# EAGLE board 4draft_onBoard_condensed (EAGLE 8.1.0)
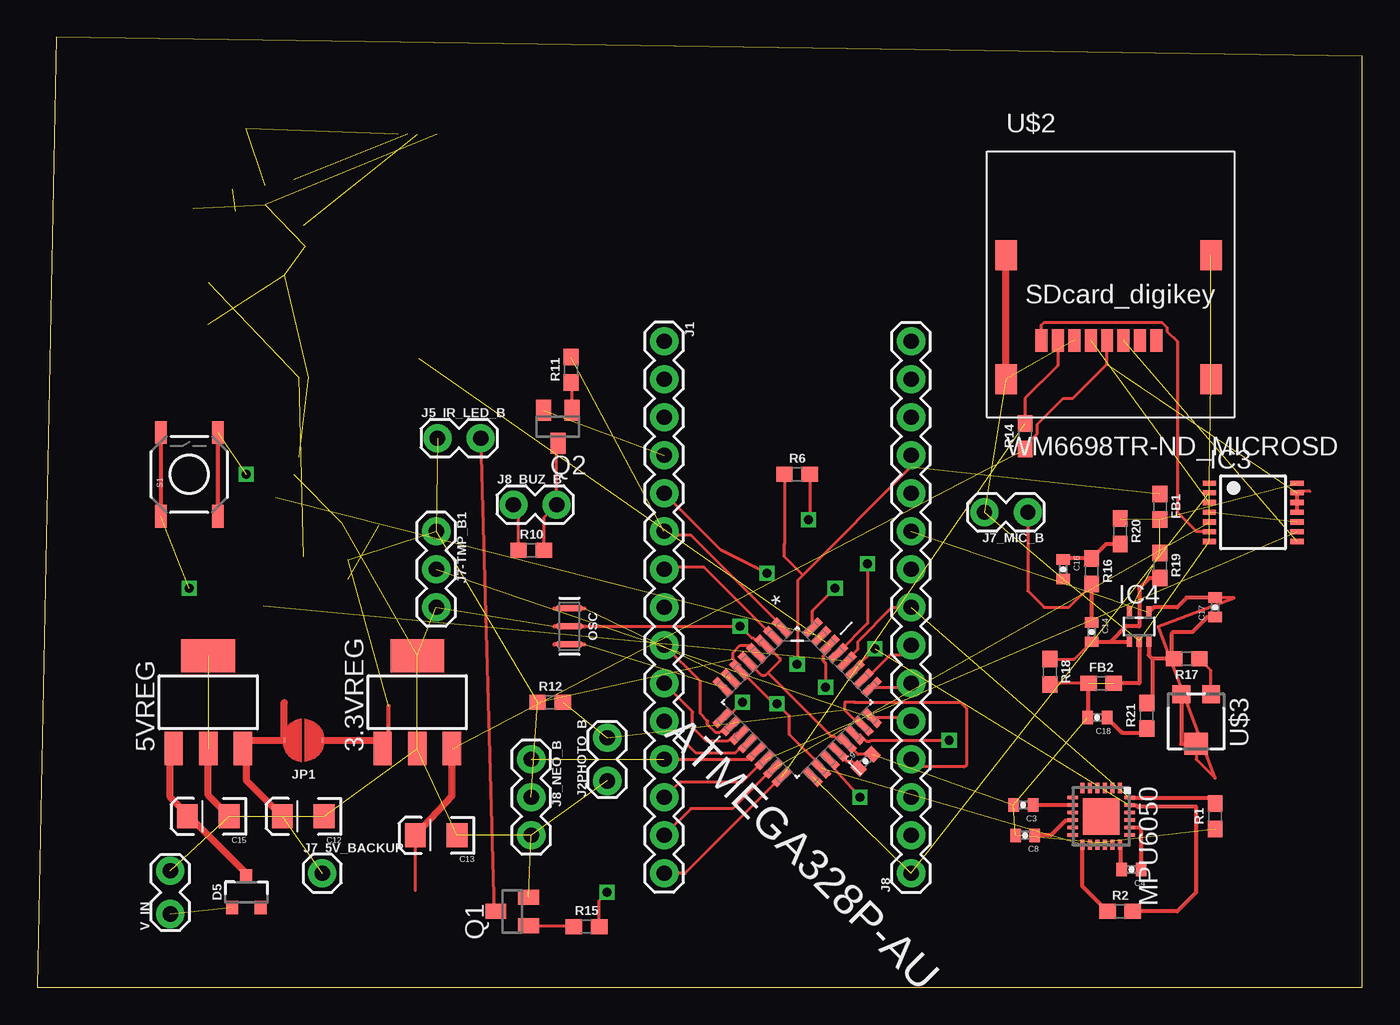
[diagram p0: board, top side]
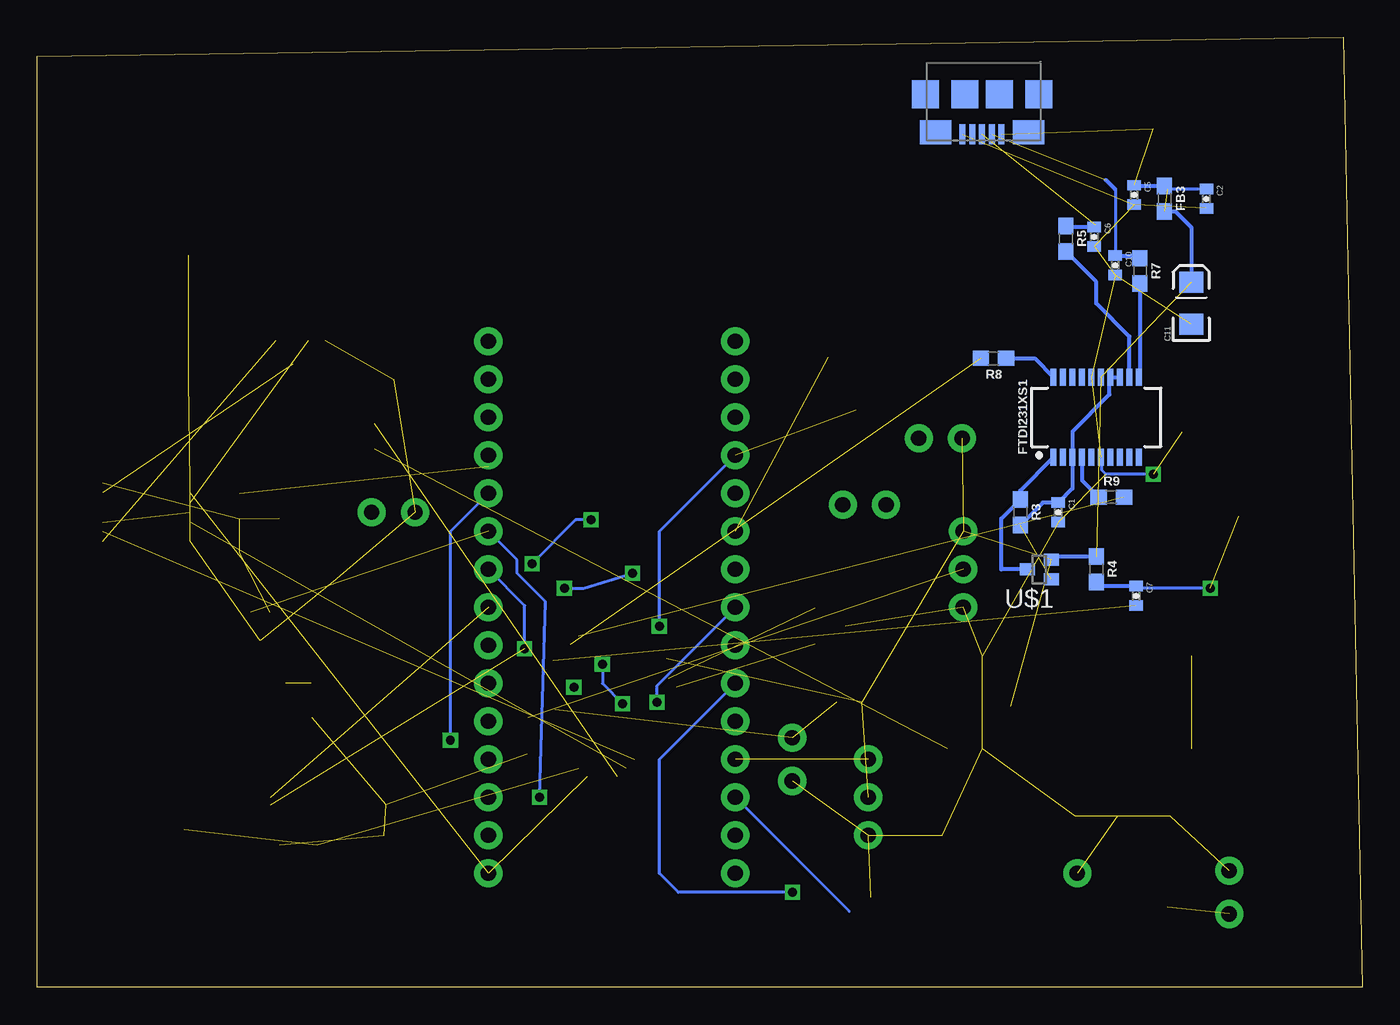
[diagram p1: board, bottom side, seen from below]

Size 88.57 x 63.49 mm. Coordinates in mm from the lower left corner, seen from the top.
Outline: 0,0 88.57,0 88.57,62.22 1.27,63.49 0,0
Copper layers (1*16): Top 0.035mm / dielectric 1.5mm / Bottom 0.035mm
Design rules "default *": minimum track width 8mil, minimum drill 14mil, track to track 8mil, track to pad 8mil, pad to pad 8mil, via to via 8mil, smd to smd 8mil, copper to edge 40mil, drill to drill 8mil, minimum pad ring 10mil, minimum via ring 8mil, stop-mask expansion 4mil, vias tented up to drill 0mil, thermal gap 10mil

## Footprints (pad centres in the part's own frame; a part is rotated, then mirrored left to right if it is on the bottom)
SOT223 = smd 1.219 x 2.235: 1 -2.311,-3.099; 2 0,-3.099; 3 2.311,-3.099 | smd 3.6 x 2.2: 4 0,3.099
QFP80P900X900X120-32N = smd 1.473 x 0.508: 1 -4.242,2.794; 2 -4.242,2.007; 3 -4.242,1.194; 4 -4.242,0.406; 5 -4.242,-0.406; 6 -4.242,-1.194; 7 -4.242,-2.007; 8 -4.242,-2.794; 17 4.242,-2.794; 18 4.242,-2.007; 19 4.242,-1.194; 20 4.242,-0.406; 21 4.242,0.406; 22 4.242,1.194; 23 4.242,2.007; 24 4.242,2.794 | smd 0.508 x 1.473: 9 -2.794,-4.242; 10 -2.007,-4.242; 11 -1.194,-4.242; 12 -0.406,-4.242; 13 0.406,-4.242; 14 1.194,-4.242; 15 2.007,-4.242; 16 2.794,-4.242; 25 2.794,4.242; 26 2.007,4.242; 27 1.194,4.242; 28 0.406,4.242; 29 -0.406,4.242; 30 -1.194,4.242; 31 -2.007,4.242; 32 -2.794,4.242
0402-CAP = smd 0.7 x 0.9: 1 -0.65,0; 2 0.65,0
EIA3216 = smd 1.4 x 1.6: A 1.4,0; C -1.4,0
SOT23-3 = smd 0.8 x 0.9: 1 -0.95,-1; 2 0.95,-1; 3 0,1.1
0603 = smd 1.1 x 1: 1 -0.85,0; 2 0.85,0
SSOP20_L = smd 0.381 x 1.143: 1 -2.857,-2.68; 2 -2.223,-2.68; 3 -1.587,-2.68; 4 -0.953,-2.68; 5 -0.318,-2.68; 6 0.318,-2.68; 7 0.953,-2.68; 8 1.587,-2.68; 9 2.223,-2.68; 10 2.857,-2.68; 11 2.857,2.68; 12 2.223,2.68; 13 1.587,2.68; 14 0.953,2.68; 15 0.318,2.68; 16 -0.318,2.68; 17 -0.953,2.68; 18 -1.587,2.68; 19 -2.223,2.68; 20 -2.857,2.68
TSSOP14 = smd 0.35 x 0.9: 1 -1.95,-2.925; 2 -1.3,-2.925; 3 -0.65,-2.925; 4 0,-2.925; 5 0.65,-2.925; 6 1.3,-2.925; 7 1.95,-2.925; 8 1.95,2.925; 9 1.3,2.925; 10 0.65,2.925; 11 0,2.925; 12 -0.65,2.925; 13 -1.3,2.925; 14 -1.95,2.925
SC70-5 = smd 0.35 x 0.8: 1 -0.65,-0.95; 2 0,-0.95; 3 0.65,-0.95; 4 0.65,0.95; 5 -0.65,0.95
1X15 = drill 1.016 pad 1.88: 1 0,0; 2 2.54,0; 3 5.08,0; 4 7.62,0; 5 10.16,0; 6 12.7,0; 7 15.24,0; 8 17.78,0; 9 20.32,0; 10 22.86,0; 11 25.4,0; 12 27.94,0; 13 30.48,0; 14 33.02,0; 15 35.56,0
MICRO-USB-DIGIKEY-FCI2 = smd 0.4 x 1.35: D+ 0,2.67; D- -0.65,2.67; GND 1.3,2.67; ID 0.65,2.67; VCC -1.3,2.67 | smd 2.1 x 1.6: SHIELD -3.1,2.55; SHIELD1 3.1,2.55 | smd 1.8 x 1.9: SHIELD2 -3.8,0; SHIELD3 -1.15,0; SHIELD4 1.15,0; SHIELD5 3.8,0
1X02_LOCK = drill 1.016 pad 1.88: 1 -0.178,0; 2 2.718,0
1X03 = drill 1.016 pad 1.88: 1 0,0; 2 2.54,0; 3 5.08,0
1X01 = drill 1.016 pad 1.88: 1 0,0
SMT-JUMPER_2_NO_NO-SILK_ROUND = smd 0.152 x 0.305: 1 -1.27,0; 2 1.27,0
QFN24-4X4 = smd 0.7 x 0.25: 1 -1.9,1.25; 2 -1.9,0.75; 3 -1.9,0.25; 4 -1.9,-0.25; 5 -1.9,-0.75; 6 -1.9,-1.25; 13 1.9,-1.25; 14 1.9,-0.75; 15 1.9,-0.25; 16 1.9,0.25; 17 1.9,0.75; 18 1.9,1.25 | smd 0.25 x 0.7: 7 -1.25,-1.9; 8 -0.75,-1.9; 9 -0.25,-1.9; 10 0.25,-1.9; 11 0.75,-1.9; 12 1.25,-1.9; 19 1.25,1.9; 20 0.75,1.9; 21 0.25,1.9; 22 -0.25,1.9; 23 -0.75,1.9; 24 -1.25,1.9 | smd 2.45 x 2.45: EXP 0,0
RESONATOR-SMD-3.2X1.3 = smd 0.45 x 1.905: 1 -1.2,0; 2 0,0; 3 1.2,0
SOT23 = smd 1 x 1.4: 1 -0.95,-1.1; 2 0.95,-1.1; 3 0,1.1
TACTILE-SWITCH-SMD = smd 1.524 x 0.762: 1 -2.794,1.905; 2 2.794,1.905; 3 -2.794,-1.905; 4 2.794,-1.905
SOT323W_INFINEON = smd 1 x 0.8: 1 -0.8,0.65; 2 0.8,0; 3 -0.8,-0.65
MICROSD2 = smd 0.8 x 1.5: CD/DAT3/SS/CS 8.95,2.6; CLK 5.65,2.6; CMD 7.85,2.6; DAT0 3.45,2.6; DAT1 2.35,2.6; DAT2 10.05,2.6; VDD 6.75,2.6; VSS 4.55,2.6 | smd 1.45 x 2: GND 0,8.3; GND2 13.7,8.3; GND3 13.7,0; GND4 0,0
TC33X-2 = smd 1.2 x 1.2: 1 -1.8,1; 3 -1.8,-1 | smd 1.5 x 1.6: 2 1.5,0

## Placement (x,y rotation side)
3.3VREG  [SOT223]  25.4,19.05 0 top
5VREG  [SOT223]  11.43,19.05 0 top
ATMEGA328P-AU  ATMEGA328P-AU  [QFP80P900X900X120-32N]  50.8,19.05 315 top
C1  .1uF  [0402-CAP]  20.32,31.75 270 bottom
C2  .1uF  [0402-CAP]  10.41,52.71 270 bottom
C3  10nF  [0402-CAP]  65.91,12.19 180 top
C4  2.2nF  [0402-CAP]  73.15,7.87 180 top
C5  .1uF  [0402-CAP]  15.24,52.96 270 bottom
C6  47pF  [0402-CAP]  17.91,50.16 270 bottom
C7  .1uF  [0402-CAP]  15.11,26.16 270 bottom
C8  .1uF  [0402-CAP]  66.04,10.16 180 top
C9  .01 uF  [0402-CAP]  55.37,15.11 45 top
C10  47pF  [0402-CAP]  16.51,48.26 270 bottom
C11  10uF  [EIA3216]  11.43,45.72 90 bottom
C12  10uF  [EIA3216]  17.78,11.43 180 top
C13  10uF  [EIA3216]  26.67,10.16 180 top
C14  .01uF  [0402-CAP]  70.48,23.75 270 top
C15  47uF  [EIA3216]  11.43,11.43 180 top
C16  .1uF  [0402-CAP]  68.58,27.94 270 top
C17  100pF  [0402-CAP]  78.74,25.4 90 top
C18  10uF  [0402-CAP]  70.87,18.03 180 top
D5  700mA/40V/533mV  [SOT23-3]  13.97,6.35 0 top
FB1  30Ω/1.8A  [0603]  75.06,32.13 270 top
FB2  30Ω/1.8A  [0603]  71.12,20.32 0 top
FB3  30Ω/1.8A  [0603]  13.21,52.71 270 bottom
FTDI231XS1  FT231XS  [SSOP20_L]  17.78,38.1 0 bottom
IC3  74ABT125PW  [TSSOP14]  81.28,31.75 270 top
IC4  MAX4466KS  [SC70-5]  73.66,24.13 0 top
J1  [1X15]  41.91,43.18 270 top
J2  USB_MINI-B_DIGIKEY  [MICRO-USB-DIGIKEY-FCI2]  25.41,59.69 180 bottom
J2PHOTO_B  [1X02_LOCK]  38.1,13.97 90 top
J5_IR_LED_B  [1X02_LOCK]  26.92,36.7 0 top
J7-TMP_B1  [1X03]  26.67,30.48 270 top
J7_5V_BACKUP  [1X01]  19.05,7.62 0 top
J7_MIC_B  [1X02_LOCK]  66.04,31.75 180 top
J8  [1X15]  58.42,7.62 90 top
J8_BUZ_B  [1X02_LOCK]  32,32.26 0 top
J8_NEO_B  [1X03]  33.02,15.24 270 top
JP1  JUMPER-SMT_2_NO_NO-SILK_ROUND  [SMT-JUMPER_2_NO_NO-SILK_ROUND]  17.78,16.51 180 top
MPU6050  MPU-6050  [QFN24-4X4]  71.12,11.43 270 top
OSC  [RESONATOR-SMD-3.2X1.3]  35.56,24.13 270 top
Q1  NPN 40V 1A SOT-23  [SOT23]  31.75,5.08 90 top
Q2  [SOT23]  34.8,37.47 180 top
R1  10k  [0603]  78.74,11.43 90 top
R2  10k  [0603]  72.39,5.08 0 top
R3  10k  [0603]  22.86,31.75 270 bottom
R4  10k  [0603]  17.78,27.94 270 bottom
R5  27  [0603]  19.81,50.04 270 bottom
R6  10k  [0603]  50.8,34.29 0 top
R7  27  [0603]  14.86,47.88 270 bottom
R8  1k  [0603]  24.64,42.04 180 bottom
R9  1k  [0603]  16.76,32.77 0 bottom
R10  1k  [0603]  33.02,29.21 0 top
R11  1k  [0603]  35.69,41.28 90 top
R12  2.2K  [0603]  34.29,19.05 0 top
R14  10k  [0603]  66.04,36.83 90 top
R15  1k  [0603]  36.7,4.06 0 top
R16  1k  [0603]  70.48,27.81 270 top
R17  22k  [0603]  76.83,21.97 180 top
R18  1M  [0603]  67.69,21.08 270 top
R19  1M  [0603]  75.06,28.19 270 top
R20  1k  [0603]  72.39,30.48 270 top
R21  1k  [0603]  74.17,18.16 90 top
S1  TAC_SWITCHSMD  [TACTILE-SWITCH-SMD]  10.16,34.29 90 top
U$1  1N7002PW  [SOT323W_INFINEON]  21.59,27.94 180 bottom
U$2  WM6698TR-ND_MICROSD  [MICROSD2]  64.77,40.64 0 top
U$3  TC33X-2POT  [TC33X-2]  77.47,17.78 270 top
V_IN  [1X02_LOCK]  8.89,5.08 90 top

## Library data of the parts
3.3VREG 5VREG = linear-technology; MPN: LT1129CST-5#PBF; OC_FARNELL: 1663375; OC_NEWARK: 57M2069
ATMEGA328P-AU = Atmega-328pu; DESCRIPTION: 8-bit Microcontroller with In-System Programmable Flash; MPN: ATMEGA328P-AU; OC_FARNELL: 1715486; OC_NEWARK: 14R4631; PACKAGE: TQFP-32; SUPPLIER: Atmel
C1-C10 C14 C16-C18 = SparkFun-Retired; PROD_ID: CAP-09885
C11-C13 C15 = SparkFun-Retired; PROD_ID: CAP-00811
D5 = SparkFun-DiscreteSemi; PROD_ID: DIO-08411
FB1-FB3 = SparkFun-Coils; PROD_ID: NDUC-07859
FTDI231XS1 = SparkFun-IC-Comms; PROD_ID: IC-11524
IC3 = 74xx-us
IC4 J2 MPU6050 U$1-U$3 = KevinKuwata1
J1 J2PHOTO_B J5_IR_LED_B J7-TMP_B1 J7_5V_BACKUP J7_MIC_B J8 J8_BUZ_B J8_NEO_B V_IN = SparkFun-Connectors
JP1 = SparkFun-Jumpers
OSC = SparkFun-Clocks
Q1 Q2 = semicon-smd-ipc
R1-R12 R14-R21 = SparkFun-Resistors; PROD_ID: RES-12535
S1 = SparkFun-Retired; PROD_ID: SWCH-08247

## Nets
2.2NF: C4.1 MPU6050.20
3.3V: 3.3VREG.3 C13.A IC3.11 IC3.12 IC3.13 R14.1 U$2.VDD
3.3VFTDI: C1.1 FTDI231XS1.3 FTDI231XS1.13 FTDI231XS1.14 R3.2 U$1.1
5REGOUT: 5VREG.3 C12.A J7_5V_BACKUP.1 JP1.2
5V: 3.3VREG.1 ATMEGA328P-AU.4 ATMEGA328P-AU.6 ATMEGA328P-AU.18 C2.1 C5.1 C11.A FB1.1 FB3.1 FB3.2 FTDI231XS1.15 J2.VCC J5_IR_LED_B.1 J7-TMP_B1.1 J8.12 J8_NEO_B.2 JP1.1 MPU6050.13 R1.1 R2.1 R4.1 R6.1 R12.1 U$1.3
10NF: C3.1 MPU6050.8
.UF: C8.1 MPU6050.10
A0: ATMEGA328P-AU.23 J2PHOTO_B.2 J8.4 R12.2
A1: ATMEGA328P-AU.24 J7-TMP_B1.2 J8.5
A2: ATMEGA328P-AU.25 J8.6
A3: ATMEGA328P-AU.26 J8.7
A6: ATMEGA328P-AU.19 C17.2 IC4.4 J8.10 U$3.2 U$3.3
A7: ATMEGA328P-AU.22 J8.11
ADO: MPU6050.9
AVCC: FB1.2 IC3.14 IC4.5 R19.1 R20.1
BUZ+: J8_BUZ_B.1 R10.1
BUZ-: J8_BUZ_B.2 Q2.3 R10.2
D2: ATMEGA328P-AU.32 J1.5
D3: ATMEGA328P-AU.1 J1.6 R11.2
D4: ATMEGA328P-AU.2 J1.7
D5: ATMEGA328P-AU.9 J1.8
D6: ATMEGA328P-AU.10 J1.9
D7: ATMEGA328P-AU.11 J1.10 R15.2
D8: ATMEGA328P-AU.12 J1.11
D9: ATMEGA328P-AU.13 J1.12 J8_NEO_B.1
D+: C6.1 J2.D+ R5.1
D-: C10.1 J2.D- R7.1
DTR: C7.1 R4.2 S1.1 S1.2
DTR_FTDI: FTDI231XS1.1 R3.1 U$1.2
GND: 3.3VREG.2 3.3VREG.4 5VREG.2 5VREG.4 ATMEGA328P-AU.3 ATMEGA328P-AU.5 ATMEGA328P-AU.21 C1.2 C2.2 C3.2 C4.2 C5.2 C6.2 C8.2 C9.2 C10.2 C11.C C12.C C13.C C15.C C16.2 C18.2 FB2.1 FB2.2 FTDI231XS1.6 FTDI231XS1.16 IC3.1 IC3.4 IC3.7 IC3.10 IC4.2 J1.4 J2.GND J2PHOTO_B.1 J7-TMP_B1.3 J7_MIC_B.2 J8_NEO_B.3 MPU6050.18 OSC.2 Q1.2 Q2.2 R18.2 S1.3 S1.4 U$2.GND U$2.GND2 U$2.GND3 U$2.GND4 U$2.VSS V_IN.2
INT: MPU6050.12
IR_-: J5_IR_LED_B.2 Q1.3
IR_LED: Q1.1 R15.1
MISO: ATMEGA328P-AU.16 J1.15 R14.2 U$2.DAT0
MOSI: ATMEGA328P-AU.15 IC3.5 J1.14
N$1: ATMEGA328P-AU.7 OSC.1
N$2: ATMEGA328P-AU.8 OSC.3
N$6: ATMEGA328P-AU.20 C9.1
N$10: IC3.6 U$2.DAT1
N$12: R17.1 U$3.1
N$14: FTDI231XS1.11 R7.2
N$15: FTDI231XS1.12 R5.2
N$17: C16.1 R16.1 R20.2
N$20: Q2.1 R11.1
N$22: D5.1 V_IN.1
N$24: C14.1 J7_MIC_B.1 R16.2
N$25: C14.2 IC4.1 R18.1 R19.2
N$29: C18.1 R21.1
N$30: C17.1 IC4.3 R17.2 R21.2
RESET: ATMEGA328P-AU.29 R6.2
RX: FTDI231XS1.4 R9.1
RX-I: ATMEGA328P-AU.30 R8.2
RXLED: FTDI231XS1.17
SCK: ATMEGA328P-AU.17 IC3.2 J8.1
SCK_BUFF: IC3.3 U$2.CLK
SCL: ATMEGA328P-AU.27 J8.9 MPU6050.23 R2.2
SDA: ATMEGA328P-AU.28 C7.2 J8.8 MPU6050.24 R1.2
SS: ATMEGA328P-AU.14 IC3.9 J1.13
SS_BUFF: IC3.8 U$2.CMD
TX: FTDI231XS1.20 R8.1
TX-O: ATMEGA328P-AU.31 R9.2
TXLED: FTDI231XS1.10
VIN: 5VREG.1 C15.A D5.3

## Tracks (layer width: path | path; a pad name or v marks a point on that pad's centre or on a via)
2.2NF
  Top 0.254: MPU6050.20 73.03,10.67 73.66,10.67 73.8,10.53 C4.1
3.3V  (2 unrouted)
  Top 0.203: C13.A 25.27,6.48 | 85.09,33.15 84.3,33.15 IC3.13 | R14.1 66.04,36.2 66.84,37 66.84,37.64 68.58,39.37 69.22,39.37 71.5,41.66 71.5,43.22 U$2.VDD
  Top 0.254: IC3.11 IC3.12 IC3.13
  Top 0.457: C13.A 27.71,12.8 3.3VREG.3
3.3VFTDI  (1 unrouted)
  Bottom 0.254: FTDI231XS1.13 FTDI231XS1.14 16.89,40.72 16.89,39.62 19.37,37.15 FTDI231XS1.3 19.37,33.35 C1.1 21.36,32.4 R3.2
5REGOUT  (1 unrouted)
  Top 0.457: 16.51,19.05 JP1.2 14.3,16.51 5VREG.3 13.97,15.72 13.97,13.84 C12.A
5V  (via drill 0.6)  (14 unrouted)
  Top 0.203: ATMEGA328P-AU.4 47.56,22.86 46.99,22.86 46.51,22.38 46.51,21.98 46.96,21.53 ATMEGA328P-AU.6 47.33,20.83 47.37,20.83 49.23,18.97 v49.45,18.97 50.29,18.12 50.29,16.89 52.38,14.8 ATMEGA328P-AU.18 | J8.12 58.42,34.78 51.19,27.55 | v50.8,21.59 50.82,21.61 50.82,27.18 51.19,27.55 | R6.1 49.95,29.63 49.91,29.59 49.91,28.83 51.19,27.55
  Top 0.254: MPU6050.13 69.87,6.75 R2.1 | 3.3VREG.1 23.5,16.36 23.5,18.8
  Top 0.457: JP1.1 22.53,16.51 3.3VREG.1
  Bottom 0.203: v50.8,21.59 50.8,20.32 v49.45,18.97 | C2.1 13.01,53.36 FB3.1
  Bottom 0.254: FB3.1 15.19,53.55 C5.1 | R4.1 20.59,28.79 U$1.3 | FB3.2 12.48,51.86 11.43,50.8 C11.A
10NF
  Top 0.254: MPU6050.8 66.58,12.18 C3.1
.UF
  Top 0.254: MPU6050.10 69.17,11.13 68.73,11.13 67.76,10.16 C8.1
A0  (2 unrouted)
  Top 0.203: 55.17,17.47 ATMEGA328P-AU.23 54.91,17.78 54.74,17.78 53.98,18.54 53.98,19.05 54.61,19.05 54.63,19.07 61.7,19.07 62.1,18.67 62.1,14.86 61.98,14.73 58.93,14.73 J8.4
A1  (1 unrouted)
  Top 0.203: ATMEGA328P-AU.24 58.17,18.03 J8.5
A2
  Top 0.203: ATMEGA328P-AU.25 58.17,20.07 J8.6
A3
  Top 0.203: ATMEGA328P-AU.26 55.43,20.63 57.02,22.22 57.78,22.22 J8.7
A6  (via drill 0.6)  (1 unrouted)
  Top 0.203: ATMEGA328P-AU.19 52.95,14.99 v54.99,12.7 | U$3.2 77.47,15.24 78.74,13.97 74.93,24.13 80.01,26.04 78.75,26.04 C17.2
  Top 0.254: U$3.3 76.47,16.28 U$3.2 | IC4.4 74.63,25.4 76.2,25.4 76.85,26.05 C17.2
  Bottom 0.203: v54.99,12.7 54.61,25.78 56.52,27.69 56.52,28.57 J8.10
A7  (via drill 0.6)
  Top 0.203: ATMEGA328P-AU.22 55,16.89 55.43,16.46 55.69,16.46 55.73,16.51 v60.96,16.51
  Bottom 0.203: v60.96,16.51 60.96,30.48 J8.11
AVCC  (4 unrouted)
BUZ+
  Top 0.203: R10.1 32.17,31.91 J8_BUZ_B.1
BUZ-
  Top 0.203: Q2.3 34.72,36.29 J8_BUZ_B.2 33.87,31.41 R10.2
D2  (via drill 0.6)
  Top 0.203: ATMEGA328P-AU.32 51.82,25.15 v53.34,26.67 | v48.77,27.69 45.72,29.21 J1.5
  Bottom 0.203: v53.34,26.67 52.07,26.67 v48.77,27.69
D3  (1 unrouted)
  Top 0.203: ATMEGA328P-AU.1 49.78,24.14 43.69,30.23 42.16,30.23 J1.6 41.78,30.35
D4
  Top 0.203: ATMEGA328P-AU.2 49.18,23.47 44.58,28.07 42.04,28.07 J1.7
D5  (via drill 0.6)
  Top 0.203: ATMEGA328P-AU.9 46.11,18.03 v47.14,19.05
  Bottom 0.203: v47.14,19.05 47.14,20.17 J1.8
D6
  Top 0.203: ATMEGA328P-AU.10 46.06,17.47 45.61,17.02 45.36,17.02 44.82,17.56 44.82,17.79 44.32,18.29 44.32,20.45 J1.9
D7  (via drill 0.6)
  Top 0.203: ATMEGA328P-AU.11 46.6,16.89 46.17,16.46 44.75,16.46 43.81,17.4 43.81,18.41 J1.10 | R15.2 37.55,5.8 v38.1,6.35
  Bottom 0.203: v38.1,6.35 45.72,6.35 46.99,7.62 46.99,15.24 J1.10
D8
  Top 0.203: ATMEGA328P-AU.12 47.33,16.34 46.63,15.65 44.04,15.65 J1.11
D9  (1 unrouted)
  Top 0.203: J1.12 47.56,15.24 ATMEGA328P-AU.13
D+  (1 unrouted)
  Bottom 0.254: 17.79,50.93 C6.1 19.74,50.82 R5.1
D-  (1 unrouted)
  Bottom 0.203: 16.51,53.34 C10.1
  Bottom 0.254: 17.14,53.97 16.51,53.34 | R7.1 14.86,48.91 C10.1
DTR  (via drill 0.6)  (1 unrouted)
  Top 0.254: S1.2 S1.1
  Bottom 0.203: v10.16,26.67 14.97,26.67 C7.1
  Bottom 0.254: C7.1 17.5,26.81 R4.2
DTR_FTDI
  Bottom 0.254: FTDI231XS1.1 22.86,33.2 R3.1 24.13,31.33 24.13,27.94 U$1.2
GND  (via drill 0.6)  (37 unrouted)
  Top 0.203: 48.83,21.02 49.66,21.84 49.66,21.97 48.73,22.89 ATMEGA328P-AU.3 48.32,22.89 47.87,23.34 47.78,23.34 v46.99,24.13 OSC.2 | 48.83,21.02 48.64,20.83 48.45,20.83 ATMEGA328P-AU.5 | 48.83,21.02 53.08,16.77 53.3,16.77 53.73,16.34 ATMEGA328P-AU.21 54.85,15.57 C9.2 | FB2.1 67.78,20.32 R18.2 | 68.56,27.3 C16.2
  Top 0.254: S1.4 S1.3 | MPU6050.18 72.39,9.51 72.39,7.99 C4.2 | IC4.2 73.66,20.32 FB2.2 | FB2.1 70.27,18.09 C18.2
  Top 0.457: C15.C 11.43,12.83 5VREG.2 | U$2.GND4 U$2.GND
  Bottom 0.203: v46.99,24.13 46.99,30.48 J1.4 | v13.97,34.29 17.14,34.29 17.4,34.54 17.4,35.36 FTDI231XS1.6
  Bottom 0.254: 17.92,49.53 C6.2 17.89,49.53
IR_-
  Top 0.203: J5_IR_LED_B.2 30.52,4.95 Q1.3
IR_LED
  Top 0.203: Q1.1 35.79,4.13 R15.1
MISO  (1 unrouted)
  Top 0.203: ATMEGA328P-AU.16 49.76,14.08 43.31,7.62 J1.15 | U$2.DAT0 68.22,41.55 66.04,39.37 R14.2
MOSI  (1 unrouted)
  Top 0.203: ATMEGA328P-AU.15 49.18,14.63 46.48,11.94 43.69,11.94 J1.14
N$1  (1 unrouted)
N$2  (1 unrouted)
N$6
  Top 0.203: ATMEGA328P-AU.20 53.51,15.7 54.1,15.11 54.45,15.11 C9.1
N$10
  Top 0.203: U$2.DAT1 67.12,44.26 67.31,44.45 75.19,44.45 75.53,44.12 75.53,43.86 76.2,43.18 76.2,31.75 77.47,30.48 78.33,30.48 IC3.6
N$12
  Top 0.203: U$3.1 78.47,21.19 R17.1
N$14
  Bottom 0.254: R7.2 14.86,40.84 FTDI231XS1.11
N$15
  Bottom 0.254: FTDI231XS1.12 15.56,43.5 17.78,45.72 17.78,47.16 R5.2
N$17
  Top 0.254: C16.1 68.65,28.66 R16.1 71.45,29.63 R20.2
N$20
  Top 0.203: Q2.1 35.75,40.36 R11.1
N$22  (1 unrouted)
N$24
  Top 0.203: R16.2 70.48,26.92 68.96,25.4 67.31,25.4 66.22,26.49 J7_MIC_B.1
  Top 0.254: C14.1 R16.2
N$25
  Top 0.203: R18.1 69.32,21.93 C14.2
  Top 0.254: 71.75,23.1 C14.2 70.3,23.28 | 71.75,23.1 72.93,23.1 IC4.1 | R19.2 74.33,27.34 73.66,26.67 73.66,24.13 72.79,24.13 71.75,23.1
N$29
  Top 0.254: C18.1 71.52,18.02 72.52,17.02 73.88,17.02 R21.1
N$30
  Top 0.254: IC4.3 74.31,22.21 74.55,21.97 | 74.55,21.97 R17.2 75.82,22.14 75.82,23.62 75.95,23.75 77.22,23.75 78.22,24.75 C17.1 | 74.55,21.97 74.55,19.39 R21.2
RESET  (via drill 0.6)
  Top 0.203: R6.2 51.65,31.33 v51.56,31.24 | v55.5,28.32 55.5,24.32 ATMEGA328P-AU.29
  Bottom 0.203: v51.56,31.24 52.58,31.24 v55.5,28.32
RX
  Bottom 0.254: FTDI231XS1.4 18.73,33.88 R9.1
RX-I  (via drill 0.6)  (1 unrouted)
  Top 0.203: ATMEGA328P-AU.30 52.95,22.57 52.51,22.12 52.51,21.87 52.7,21.67 v52.7,20.07
SCK  (2 unrouted)
SCK_BUFF  (1 unrouted)
SCL  (via drill 0.6)  (1 unrouted)
  Top 0.203: ATMEGA328P-AU.27 54.64,21.28 v55.99,22.63
  Top 0.254: R2.2 76.2,5.08 77.47,6.35 77.47,12.07 73.58,12.07 73.51,12.13 73.06,12.13 MPU6050.23
  Bottom 0.203: v55.99,22.63 55.99,25.51 J8.9
SDA  (2 unrouted)
  Top 0.203: ATMEGA328P-AU.28 54.09,21.83 54.86,22.61 54.86,23.11 57.15,25.4 J8.8
  Top 0.254: MPU6050.24 78.34,12.68 R1.2
SS  (1 unrouted)
  Top 0.203: ATMEGA328P-AU.14 48.61,15.21 47.12,13.72 42.93,13.72 J1.13
  Bottom 0.203: 34.29,5.08 J1.13
SS_BUFF  (1 unrouted)
TX
  Bottom 0.254: R8.1 21.89,42.04 FTDI231XS1.20
TX-O  (1 unrouted)
VIN
  Top 0.457: D5.3 13.97,7.62 10.03,11.56 | 5VREG.1 8.89,15.72 8.89,12.7 10.03,11.56 | C15.A 10.03,11.56